# Altium PCB DriverBoard.PcbDoc
Units mm, origin at the board's own origin, x right, y up, seen from the top; angles counter-clockwise.
Board outline 74 x 64 mm, 4 copper layers (Top Signal Layer, Power Layer, Ground Layer, Bottom Signal Layer), stack 2.024 mm thick; 139 components, 34 nets, 401 pads, 541 vias.
Unrouted connection lines stored in the file: 176.
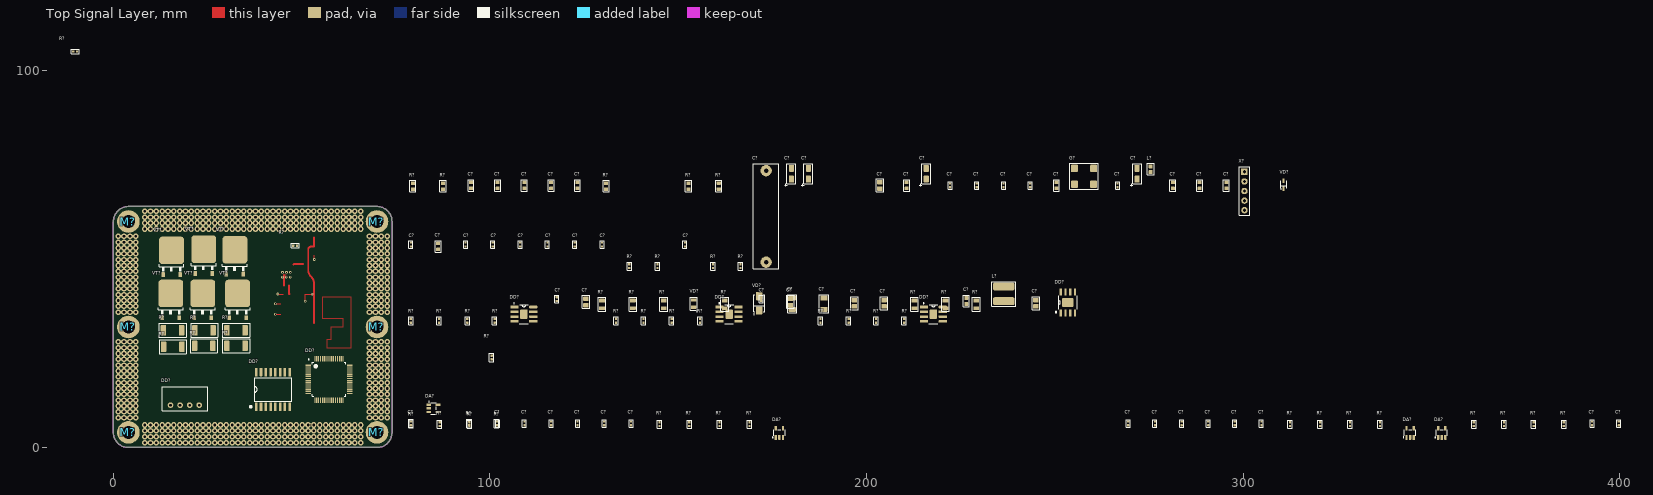
[diagram p0: Top Signal Layer view]
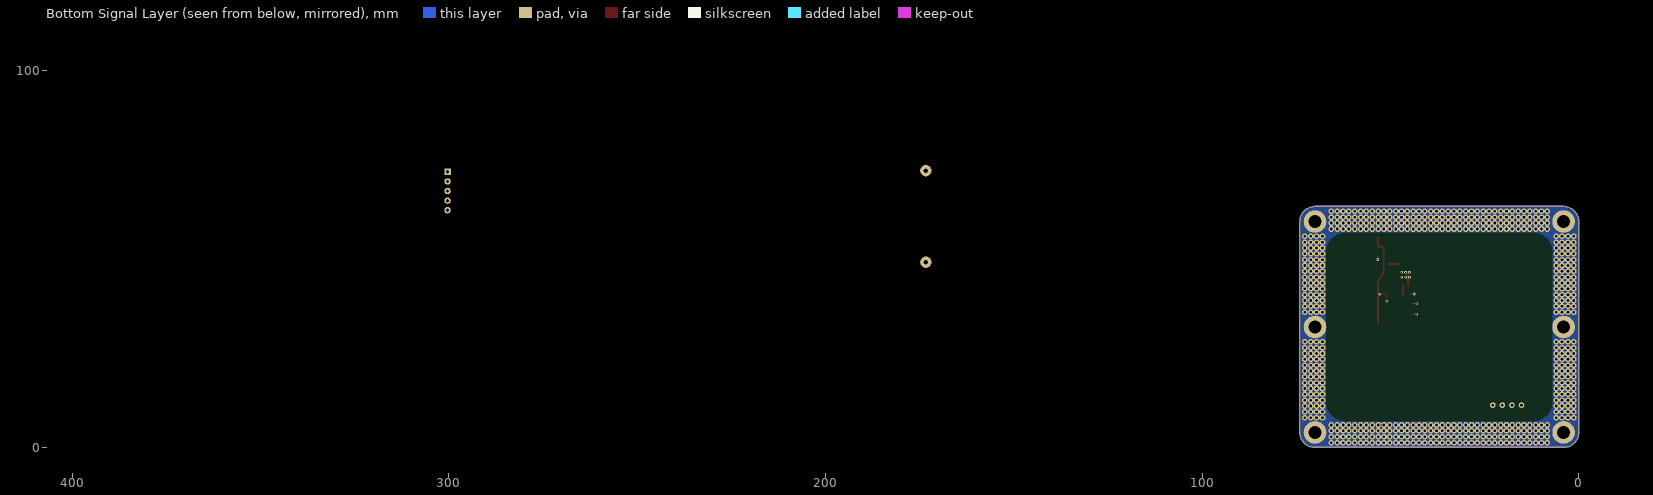
[diagram p1: Bottom Signal Layer view, seen from below]

## Layer stack, top to bottom
Top Solder: solder mask 0.0102, Solder Resist, Dk 3.5
Top Signal Layer: signal copper 0.0356
Dielectric 1: core 1.5, FR-4, Dk 4.2
Power Layer: signal copper 0.036
Dielectric 3: prepreg 0.127, Dk 4.2
Ground Layer: signal copper 0.036
Dielectric 2: core 0.254, Dk 4.2
Bottom Signal Layer: signal copper 0.0356
Bottom Solder: solder mask 0.0102, Solder Resist, Dk 3.5

## Board outline
0,3.9 0,60 cw(c4,60) 3.9,63.999 3.9,64 70.099,64 70.1,63.999 cw(c70,60) 74,60 74,3.901 73.999,3.9 cw(c70,4) 70,0 4,0 cw(c4,4)

## Design rules (kind name [scope] priority, off if disabled: settings)
Clearance "Stitching EGND" [IsStitchingVia and InNet('EGND') vs (IsVia and (Not IsStitchingVia)) Or IsPad] p1: gap=0.2 ignorepadtopadclearanceinfootprint=FALSE
Clearance Clearance_FU [InNet('NetFU1_1') vs InNet('GND')] p2: gap=0.4 ignorepadtopadclearanceinfootprint=FALSE except(0: Arc-Hole Track-Hole SMDPad-Hole THPad-Hole Via-Hole Fill-Hole Poly-Hole Region-Hole Text-Hole)
Clearance Clearance_12 [InNet('12B') vs InNet('GND')] p3: gap=0.4 ignorepadtopadclearanceinfootprint=FALSE except(0: Arc-Hole Track-Hole SMDPad-Hole THPad-Hole Via-Hole Fill-Hole Poly-Hole Region-Hole Text-Hole)
Clearance Clearance_tracks_inner [OnLayer('Power Layer') OR OnLayer('Ground Layer')] p4: gap=0.35 ignorepadtopadclearanceinfootprint=FALSE except(0: Arc-Hole Track-Hole SMDPad-Hole THPad-Hole Via-Hole Fill-Hole Poly-Hole Region-Hole Text-Hole) // Зазоры между проводниками на внутренних слоях
Clearance [All] p5: gap=0.2 ignorepadtopadclearanceinfootprint=FALSE except(0: Arc-Hole Track-Hole SMDPad-Hole THPad-Hole Via-Hole Fill-Hole Poly-Hole Region-Hole Text-Hole)
ComponentClearance [All] p1: gap=0.3 collisioncheckmode=3 verticalgap=0.01 showdistances=FALSE
HoleSize [All] p1: absolutevalues=TRUE maxlimit=10 minlimit=0.3 maxpercent=80.000 minpercent=20.000
MinimumSolderMaskSliver [All] p1: minsoldermaskwidth=0.09
PolygonConnect PolygonConnect_Via [IsVia] p1: connectstyle=Direct reliefconductorwidth=0.254 reliefentries=4 polygonreliefangle="90 Angle" airgapwidth=0.2
PolygonConnect PolygonConnect_EGND [InNet('EGND')] p2: connectstyle=Direct reliefconductorwidth=0.254 reliefentries=4 polygonreliefangle="90 Angle" airgapwidth=0.2
PolygonConnect PolygonConnect_1 [All] p3: connectstyle=Relief reliefconductorwidth=0.8 reliefentries=4 polygonreliefangle="90 Angle" airgapwidth=0.254
RoutingCorners [All] p1: cornerstyle=Round minsetback=0.2 maxsetback=2
RoutingVias [All] p1: holewidth=0.711 width=1.27 viastyle="Through Hole" minholewidth=0.711 minwidth=1.27 maxholewidth=0.711 maxwidth=1.27
SilkToSilkClearance [All] p1: silktosilkclearance=0
SilkToSolderMaskClearance [IsPad] p1: minsilkscreentomaskgap=0 clearancetoexposedcopper=TRUE
SolderMaskExpansion [All] p1: expansion=0.05
Width [All] p1: maxlimit=4 minlimit=0.2 preferedwidth=0.2
Width 3,3В [InNet('3,3В')] p2: maxlimit=2 minlimit=0.2 preferedwidth=1
Width 24В [InNet('24В')] p3: maxlimit=4 minlimit=0.2 preferedwidth=4
Width 5В [InNet('5В')] p4: maxlimit=3 minlimit=0.2 preferedwidth=3
24 further rules are at their usual default settings.

## Classes and differential pairs
component class DriverBoard_Driver: C? DD? R?
component class DriverBoard_Amp: C? DA? R?
component class DriverBoard_Bridge: R? VT?
component class DriverBoard_DC: C? DD? L? M? R? VD?
component class DriverBoard_MCU: C? DD? G? L? R? VD? X?

## Components (designator, comment, footprint, x,y, rotation, side; value= is the part's Value field where it differs from the comment)
C? "Capacitor" C0402 171.999,39.4 r90 top value=0,1мк
C? "Capacitor" C0805 179.749,38.65 r90 top value=1мк
C? "Capacitor" C0603 226.499,38.9 r90 top value=0,15мк
C? "Capacitor" C0402 117.749,39.4 r90 top value=0,1мк
C? "Capacitor" C0805 125.499,38.65 r90 top value=1мк
C? "Capacitor" C0402 93.5,53.9 r90 top value=0,1мк
C? "Capacitor" C0402 100.75,53.9 r90 top value=0,1мк
C? "Capacitor" C0402 108,53.9 r90 top value=0,1мк
C? "Capacitor" C0402 115.249,53.9 r90 top value=0,1мк
C? "Capacitor" C0402 122.499,53.9 r90 top value=0,1мк
C? "Capacitor" C0402 129.749,53.9 r90 top value=0,1мк
C? "Capacitor" C0402 151.749,53.9 r90 top value=0,1мк
C? "Capacitor" C0402 79,53.9 r90 top value=0,1мк
C? "Capacitor" C0603 86.25,53.4 r90 top value=1мк
C? "Capacitor_pol" "TANTAL CASE A" 180.049,72.7 r90 top value=10мк
C? "Capacitor_pol" "TANTAL CASE A" 184.549,72.7 r90 top value=10мк
C? "Capacitor" K78-2 173.349,61.4 r90 top value=1200
C? "Capacitor" C0603 123.249,69.6 r90 top value=0,01мк
C? "Capacitor" C0603 116.249,69.6 r90 top value=1мк
C? "Capacitor" C0603 94.95,69.6 r90 top value=1мк
C? "Capacitor" C0603 102.05,69.6 r90 top value=0,1мк
C? "Capacitor" C0603 109.15,69.6 r90 top value=0,1мк
C? "Capacitor" C0603 295.549,69.6 r90 top value=0,15мк
C? "Capacitor" C0603 288.449,69.6 r90 top value=2,2мк
C? "Capacitor" C0603 281.349,69.6 r90 top value=2,2мк
C? "Capacitor_pol" "TANTAL CASE A" 215.849,72.7 r90 top value=10мк
C? "Capacitor_pol" "TANTAL CASE A" 271.849,72.7 r90 top value=10мк
C? "Capacitor" C0402 266.649,69.6 r90 top value=0,1мк
C? "Capacitor" C0805 203.549,69.6 r90 top value=1мк
C? "Capacitor" C0603 210.649,69.6 r90 top value=0,15мк
C? "Capacitor_pol" C0603 250.449,69.6 r90 top value=100мк
C? "Capacitor" C0402 243.449,69.6 r90 top value=1000
C? "Capacitor" C0402 236.349,69.6 r90 top value=10
C? "Capacitor" C0402 229.249,69.6 r90 top value=10
C? "Capacitor" C0402 222.149,69.6 r90 top value=0,1мк
C? "Capacitor" C0805 204.649,38.3 r90 top value=0,01мк
C? "Capacitor" C0805 244.949,38.3 r90 top value=0,01мк
C? "Capacitor" C0805 196.749,38.3 r90 top value=0,01мк
C? "Capacitor" C1206 188.649,38.2 r90 top value=4,7мк
C? "Capacitor" C1206 180.249,38.2 r90 top value=4,7мк
C? "Capacitor" C0402 102.05,6.4 r90 top value=0,1мк
C? "Capacitor" C0402 130.349,6.4 r90 top value=1000
C? "Capacitor" C0402 109.15,6.4 r90 top value=10
C? "Capacitor" C0402 269.449,6.4 r90 top value=10
C? "Capacitor" C0402 392.649,6.4 r90 top value=0,1мк
C? "Capacitor" C0402 297.749,6.4 r90 top value=0,1мк
C? "Capacitor" C0402 276.549,6.4 r90 top value=1000
C? "Capacitor" C0402 116.249,6.4 r90 top value=10
C? "Capacitor" C0402 137.449,6.4 r90 top value=10
C? "Capacitor" C0402 123.249,6.4 r90 top value=0,1мк
C? "Capacitor" C0402 283.649,6.4 r90 top value=0,1мк
C? "Capacitor" C0402 399.749,6.4 r90 top value=10
C? "Capacitor" C0402 304.849,6.4 r90 top value=10
C? "Capacitor" C0402 290.749,6.4 r90 top value=1000
C? "Capacitor" C0402 79.05,6.4 r90 top value=0,1мк
DA? "LMV321ILT" SOT23-5 85,10.4 r0 top
DA? "LMV321ILT" SOT23-5 352.749,3.9 r90 top
DA? "LMV321ILT" SOT23-5 176.849,3.9 r90 top
DA? "LMV321ILT" SOT23-5 344.349,3.9 r90 top
DD? "UCC27201A" HSOP8 217.749,35.4 r0 top
DD? "UCC27201A" HSOP8 163.499,35.4 r0 top
DD? "UCC27201A" HSOP8 109,35.4 r0 top
DD? "STM32F405RGT6" LQFP64 57.25,18.075 r0 top
DD? "P6AU-xxxxELF" SIP4 15.17,11.25 r0 top
DD? "Name" SO16 42.375,15.425 r90 top
DD? "TPS5450" "SO Powerpad8" 253.449,38.5 r0 top
G? "KXO" QSMD7x5.2x1.8 257.749,72 r0 top
L? "Inductor" L0603 275.449,73.9 r90 top
L? "Inductor" SDR0604 236.449,40.8 r0 top value=15мкГн
M? "SCREW" SCREW3#1 6.8,6.6 r0 top
M? "SCREW" SCREW3#2 4,32 r0 top
M? "SCREW" SCREW3#3 15.4,52.6 r0 top
M? "SCREW" SCREW3#2 70,60 r0 top locked
M? "SCREW" SCREW3#2 70,32 r0 top locked
M? "SCREW" SCREW3#2 70,4 r0 top locked
R? "Resistor_0,062Вт" R0402 101.75,6.4 r90 top value=20к
R? "Resistor_0,062Вт" R0402 94.5,6.4 r90 top value=1к
R? "Resistor_0,062Вт" R0402 79,6.4 r90 top value=20к
R? "Resistor_0,5Вт" R2010 15.75,26.75 r180 top value=0,027
R? "Resistor_0,5Вт" R2010 15.711,31.131 r180 top value=0,027
R? "Resistor_0,5Вт" R2010 32.561,31.131 r180 top value=0,027
R? "Resistor_0,5Вт" R2010 24.085,31.131 r180 top value=0,027
R? "Resistor_0,5Вт" R2010 32.561,27 r180 top value=0,027
R? "Resistor_0,5Вт" R2010 24.011,27 r180 top value=0,027
R? "Resistor_0,062Вт" R0402 187.749,33.65 r90 top value=10к
R? "Resistor_0,062Вт" R0402 195.249,33.65 r90 top value=10к
R? "Resistor_0,062Вт" R0402 209.999,33.65 r90 top value=10
R? "Resistor_0,062Вт" R0402 202.499,33.65 r90 top value=10
R? "Resistor_0,062Вт" R0402 133.499,33.65 r90 top value=10к
R? "Resistor_0,062Вт" R0402 140.749,33.65 r90 top value=10к
R? "Resistor_0,062Вт" R0402 155.749,33.65 r90 top value=10
R? "Resistor_0,062Вт" R0402 148.249,33.65 r90 top value=10
R? "Resistor_0,062Вт" R0402 79,33.65 r90 top value=10к
R? "Resistor_0,062Вт" R0402 86.5,33.65 r90 top value=10к
R? "Resistor_0,062Вт" R0402 101.25,33.65 r90 top value=10
R? "Resistor_0,062Вт" R0402 94,33.65 r90 top value=10
R? "Resistor_0,062Вт" R0402 159.249,48.15 r90 top value=47
R? "Resistor_0,062Вт" R0402 144.499,48.15 r90 top value=47
R? "Resistor_0,062Вт" R0402 136.999,48.15 r90 top value=47
R? "Resistor_0,062Вт" R0402 166.499,48.15 r90 top value=10к
R? "Resistor_0,062Вт" R0603 152.749,69.4 r90 top value=5,1к
R? "Resistor_0,062Вт" R0603 87.55,69.4 r90 top value=62
R? "Resistor_0,062Вт" R0603 130.849,69.4 r90 top value=62
R? "Resistor_0,062Вт" R0603 160.749,69.4 r90 top value=5,1к
R? "Resistor_0,062Вт" R0603 79.55,69.4 r90 top value=5,1к
R? "Resistor_0,125Вт" R0805 162.349,38 r90 top value=0
R? "Resistor_0,125Вт" R0805 229.149,38 r90 top value=0
R? "Resistor_0,125Вт" R0805 129.749,38 r90 top value=0
R? "Resistor_0,125Вт" R0805 137.949,38 r90 top value=0
R? "Resistor_0,125Вт" R0805 146.149,38 r90 top value=3,3к
R? "Resistor_0,125Вт" R0805 220.949,38 r90 top value=330
R? "Resistor_0,125Вт" R0805 212.749,38 r90 top value=10к
R? "Resistor_0,062Вт" R0402 100.45,23.9 r90 top value=1к
R? "Resistor_0,062Вт" R0402 -10.135,105.175 r180 top value=1к
R? "Resistor_0,062Вт" R0402 48.25,53.603 r180 top value=20к
R? "Resistor_0,062Вт" R0402 94.55,6.2 r90 top value=1к
R? "Resistor_0,062Вт" R0402 152.949,6.2 r90 top value=20к
R? "Resistor_0,062Вт" R0402 168.949,6.2 r90 top value=1к
R? "Resistor_0,062Вт" R0402 320.449,6.2 r90 top value=1к
R? "Resistor_0,062Вт" R0402 377.149,6.2 r90 top value=20к
R? "Resistor_0,062Вт" R0402 385.149,6.2 r90 top value=1к
R? "Resistor_0,062Вт" R0402 336.349,6.2 r90 top value=20к
R? "Resistor_0,062Вт" R0402 86.65,6.2 r90 top value=1к
R? "Resistor_0,062Вт" R0402 145.049,6.2 r90 top value=1к
R? "Resistor_0,062Вт" R0402 160.949,6.2 r90 top value=1к
R? "Resistor_0,062Вт" R0402 312.449,6.2 r90 top value=1к
R? "Resistor_0,062Вт" R0402 361.249,6.2 r90 top value=1к
R? "Resistor_0,062Вт" R0402 369.249,6.2 r90 top value=1к
R? "Resistor_0,062Вт" R0402 328.349,6.2 r90 top value=1к
VD? "DiodeSchottky" SOD-323 310.749,69.8 r90 top
VD? "зеленый" L_0805 154.149,38.2 r90 top
VD? "DiodeSchottky" SMA 171.449,38.3 r90 top
VT? "N-MOSFET" DPAK 23.75,40.75 r0 top
VT? "N-MOSFET" DPAK 33,40.75 r0 top
VT? "N-MOSFET" DPAK 15.45,52.198 r0 top
VT? "N-MOSFET" DPAK 32.261,52.33 r0 top
VT? "N-MOSFET" DPAK 15.25,40.75 r0 top
VT? "N-MOSFET" DPAK 24,52.5 r0 top
X? "Header_5_plg" PLS-5 300.349,68.1 r0 top

## Footprints (in the part's own frame and the unit in brackets; to place one, negate y for a bottom-side part, rotate by r counter-clockwise, add the part's x,y. Pads: shape width x height; smd on the part's side, far side on the other; paste and mask are expansions set on the pad)
C0402 [mm]
  rrect25% 0.59x0.6 smd: 1(-0.5,-0.02) 2(0.525,-0.02)
  silkscreen extent -0.98,-0.55 0.98,0.51, body extent -0.49,-0.25 0.51,0.25, height 0.48
C0603 [mm]
  rrect25% 0.94x1.03 smd: 1(-0.8,0) 2(0.8,0)
  silkscreen extent -1.55,-0.77 1.53,0.77, body extent -0.8,-0.4 0.8,0.4, height 0.9
C0805 [mm]
  rrect25% 1.21x1.46 smd paste-5: 1(-0.845,0) 2(0.845,0)
  silkscreen extent -1.73,-1 1.73,1, body extent -1,-0.62 1,0.63, height 0.78
C1206 [mm]
  rrect25% 1.28x1.87 smd: 1(-1.528,-0.024) 2(1.472,-0.024)
  silkscreen extent -2.47,-1.25 2.4,1.22, body extent -1.6,-0.85 1.6,0.85, height 1.75
DPAK [mil]
  rrect25% 37x52 smd: 1(-89,-248) 3(89,-248)
  rrect25% 260x288 smd: 2(0,6)
  silkscreen extent -130,-213 130,-142, body extent -193,-266 128,108, height 91
HSOP8 [mm]
  rrect25% 2.17x0.68 smd: 1(-2.505,1.905) 2(-2.505,0.635) 3(-2.505,-0.635) 4(-2.505,-1.905) 5(2.505,-1.905) 6(2.505,-0.635) 7(2.505,0.635) 8(2.505,1.905)
  rrect25% 2.007x2.489 smd: ""(0,0)
  silkscreen extent -2.74,-2.5 1.2,3.02, body extent -3.01,-2.35 3.01,2.35, height 1.7
K78-2 [mm]
  round 3 hole 1.25 mask+0.102: 1(12.1,0)
  round 3 hole 1.25: 2(-12.2,0)
  silkscreen extent -14,-3.4 13.9,3.5, body extent -12.5,-3 12.5,3, height 13
L0603 [mm]
  rrect25% 1.05x1.07 smd paste-5: 1(-0.76,0) 2(0.76,0)
  silkscreen extent -1.53,-0.9 1.53,0.9, body extent -0.8,-0.4 0.8,0.4, height 0.8
L_0805 [mm] "SMD LED LAMP"
  rrect25% 0.91x1.46 smd: 1(-0.975,0) 2(0.975,0)
  silkscreen extent -2.15,-0.95 1.68,0.95, body extent -1.01,-0.62 1.01,0.63, height 1.1
LQFP64 [mm] "64-Pin Low Profile Quad Pack 0.5 mm Pitch, IPC High Density"
  rrect25% 1.5x0.3 smd mask+0.05: 1(-5.5,3.75) 2(-5.5,3.25) 3(-5.5,2.75) 4(-5.5,2.25) 5(-5.5,1.75) 6(-5.5,1.25) 7(-5.5,0.75) 8(-5.5,0.25) 9(-5.5,-0.25) 10(-5.5,-0.75) 11(-5.5,-1.25) 12(-5.5,-1.75) 13(-5.5,-2.25) 14(-5.5,-2.75) 15(-5.5,-3.25) 16(-5.5,-3.75) 33(5.5,-3.75) 34(5.5,-3.25) 35(5.5,-2.75) 36(5.5,-2.25) 37(5.5,-1.75) 38(5.5,-1.25) 39(5.5,-0.75) 40(5.5,-0.25) 41(5.5,0.25) 42(5.5,0.75) 43(5.5,1.25) 44(5.5,1.75) 45(5.5,2.25) 46(5.5,2.75) 47(5.5,3.25) 48(5.5,3.75)
  rrect25% 0.3x1.5 smd mask+0.05: 17(-3.75,-5.5) 18(-3.25,-5.5) 19(-2.75,-5.5) 20(-2.25,-5.5) 21(-1.75,-5.5) 22(-1.25,-5.5) 23(-0.75,-5.5) 24(-0.25,-5.5) 25(0.25,-5.5) 26(0.75,-5.5) 27(1.25,-5.5) 28(1.75,-5.5) 29(2.25,-5.5) 30(2.75,-5.5) 31(3.25,-5.5) 32(3.75,-5.5) 49(3.75,5.5) 50(3.25,5.5) 51(2.75,5.5) 52(2.25,5.5) 53(1.75,5.5) 54(1.25,5.5) 55(0.75,5.5) 56(0.25,5.5) 57(-0.25,5.5) 58(-0.75,5.5) 59(-1.25,5.5) 60(-1.75,5.5) 61(-2.25,5.5) 62(-2.75,5.5) 63(-3.25,5.5) 64(-3.75,5.5)
  silkscreen extent -5.45,-4.5 4.5,5.42, body extent -6,-6 6,6, height 1.5
PLS-5 [mm]
  rect 1.7x1.7 hole 0.9: 1(0,5.08)
  round 1.7 hole 0.9: 2(0,2.54) 3(0,0)
  round 1.7 hole 0.9 mask+0.102: 4(0,-2.54) 5(0,-5.08)
  silkscreen extent -1.4,-6.48 1.4,6.46, body extent -1.27,-6.35 1.27,6.35, height 8.54
QSMD7x5.2x1.8 [mm]
  rrect25% 1.8x2 smd: 1(-2.54,-2.1) 2(2.54,-2.1) 3(2.54,2.1) 4(-2.54,2.1)
  silkscreen extent -3.81,-3.43 3.81,3.43, body extent -3.5,-2.54 3.5,2.54, height 1.3
R0402 [mm]
  rrect25% 0.61x0.6 smd: 1(-0.5,0) 2(0.5,0)
  silkscreen extent -1.1,-0.6 1.07,0.6, body extent -0.55,-0.25 0.45,0.25, height 0.35
R0603 [mm]
  rrect25% 0.92x1.08 smd: 1(-0.8,0) 2(0.8,0)
  silkscreen extent -1.55,-0.8 1.55,0.82, body extent -0.8,-0.4 0.8,0.4, height 0.5
R0805 [mm] "Chip Resistor, 2-Leads, Body 2,10x1,30mm, IPC Medium Density"
  rrect25% 1.02x1.53 smd paste-5: 1(-1.008,0) 2(1.008,0)
  silkscreen extent -1.78,-1 1.85,1.02, body extent -1.1,-0.7 1.1,0.7, height 0.55
R2010 [mm]
  rrect25% 1.45x2.73 smd: 1(-2.415,0) 2(2.415,0)
  silkscreen extent -3.6,-1.9 3.6,1.9, body extent -2.5,-1.25 2.5,1.25, height 0.6
SCREW3#1 [mm]
  round 6 hole 3.4: 1(-2.8,-2.6)
SCREW3#2 [mm]
  round 6 hole 3.4: 1(0,0)
SCREW3#3 [mm]
  round 6 hole 3.4: 1(-11.4,7.4)
SDR0604 [mm] "SMD Power Inductors"
  rrect50% 5.8x2.1 smd: 1(0,1.95) 2(0,-1.95)
  silkscreen extent -3.2,-3.27 3.2,3.25, body extent -2.8,-2.75 2.8,2.75, height 4.55
SIP4 [mm]
  round 1.5 hole 0.7: 1(0,0) 2(2.54,0) 4(7.62,0)
  round 1.5 hole 0.7 paste+0: 3(5.08,0)
  silkscreen extent -2.2,-1.5 9.9,4.9, body extent -2.04,-1.28 9.64,4.72, height 10.2
SMA [mm]
  rrect25% 2.17x1.74 smd: 1(-1.88,0) 2(1.88,0)
  silkscreen extent -3.04,-1.46 2.29,1.46, body extent -2.5,-1.35 2.5,1.35, height 2.15
SO16 [mm]
  rrect25% 2.26x0.69 smd: 1(-4.61,4.445) 2(-4.61,3.175) 3(-4.61,1.905) 4(-4.61,0.635) 5(-4.61,-0.635) 6(-4.61,-1.905) 7(-4.61,-3.175) 8(-4.61,-4.445) 9(4.61,-4.445) 10(4.61,-3.175) 11(4.61,-1.905) 12(4.61,-0.635) 13(4.61,0.635) 14(4.61,1.905) 15(4.61,3.175) 16(4.61,4.445)
  silkscreen extent -4.86,-5.03 3.1,6.11, body extent -5.3,-5.27 5.3,5.23, height 2.59
"SO Powerpad8" [mm]
  rrect25% 0.61x1.91 smd: 1(-1.905,-2.78) 2(-0.635,-2.78) 3(0.635,-2.78) 4(1.905,-2.78) 5(1.905,2.78) 6(0.635,2.78) 7(-0.635,2.78) 8(-1.905,2.78)
  rrect25% 3.1x2.41 smd: 6(0,0)
  silkscreen extent -3.34,-2.76 2.5,1.75, body extent -2.45,-2.92 2.45,2.85, height 1.45
SOD-323 [mm]
  rrect25% 1.26x0.58 smd: 1(-1.03,0) 2(1.03,0)
  silkscreen extent -1.26,-0.82 1,0.82, body extent -1.3,-0.67 1.3,0.68, height 1.1
SOT23-5 [mm]
  rrect25% 1.26x0.61 smd: 1(-1.225,0.95) 2(-1.225,0) 3(-1.225,-0.95) 4(1.225,-0.95) 5(1.225,0.95)
  silkscreen extent -1.3,-1.52 0.75,1.84, body extent -1.6,-1.56 1.6,1.55, height 1.45
"TANTAL CASE A" [mm]
  rrect25% 1.81x1.36 smd: 1(-1.425,0) 2(1.425,0)
  silkscreen extent -3.37,-1.2 2.7,1.82, body extent -1.7,-0.9 1.7,0.9, height 1.8

## Part data
C? C? C? C? C? C? C? C? C? C? C? C? C? C? C? C? C? C?: library part cap277, "Конденсатор", Manufacture=Murata, Part Name=Ceramic, Part Number=GRM155R71H104KE14D, Voltage=50В, id=cap277, tga=0,10%, TKE=X7R
C? C? C?: library part cap151, "Конденсатор", Manufacture=Murata, Part Name=Ceramic, Part Number=GRM21BR71H105K, Voltage=50B, id=cap151, TKE=X7R
C? C? C?: library part cap132, "Конденсатор", Manufacture="Samsung Electro-Mechanics", Part Name=Ceramic, Part Number=CL10B154KB8VPNC, Voltage=50B, id=cap132, TKE=X7R
C? C? C?: library part cap133, "Конденсатор", Manufacture=Murata, Part Name=Ceramic, Part Number=GRM188R71C105KA12D**, Voltage=16B, id=cap133, TKE=X7R
C? C? C? C?: library part cap199, "Конденсатор полярный", Manufacture=Vishay, Part Name=Tantal, Part Number=293D106X9016A2TE3, Voltage=16В, id=cap199
C?: library part cap276, "Конденсатор", Manufacture=Россия, Part Name=Film, Part Number=К78-2-1200пФ-1600В,10%, Voltage=1600B, id=cap276, tga=0,10%
C?: library part cap124, "Конденсатор", Manufacture=Murata, Part Name=Ceramic, Part Number=GRM188R71H103K, Voltage=50B, id=cap124, TKE=X7R
C? C?: library part cap131, "Конденсатор", Manufacture=Murata, Part Name=Ceramic, Part Number=GRM188R71H104KA93D, Voltage=50B, id=cap131, TKE=X7R
C? C?: library part cap134, "Конденсатор", Manufacture=Murata, Part Name=Ceramic, Part Number=GRM188R71A225KE15D, Voltage=50B, id=cap134, TKE=X7R
C?: library part cap209, "Конденсатор полярный", Manufacture=Vishay, Part Name=Tantal, Part Number=293D107X9016D2TE3, Voltage=16В, id=cap209
C? C? C? C?: library part cap28, "Конденсатор", Manufacture=Murata, Part Name=Ceramic, Part Number=GRM1555C1H102J, Voltage=50B, id=cap28, TKE=NP0
C? C? C? C? C? C? C? C?: library part cap5, "Конденсатор", Manufacture=Murata, Part Name=Ceramic, Part Number=GRM1535C1H100J, Voltage=50B, id=cap5, TKE=NP0
C? C? C?: library part cap136, "Конденсатор", Manufacture=Murata, Part Name=Ceramic, Part Number=GRM216R71H103K, Voltage=50B, id=cap136, TKE=X7R
C? C?: library part cap188, "Конденсатор", Manufacture=Murata, Part Name=Ceramic, Part Number=GRM31CR71H475KA12L, Voltage=50В, id=cap188, TKE=X7R
DA? DA? DA? DA?: library part amp10, "HIGH-DRIVE OPERATIONAL AMPLIFIERS WITH SHUTDOWN", Input Bias Current=10nA, Manufacture="ST Microelectronics", Offset voltage=0,1mB, Part Name="Micropower / Operational Amplifiers", Supply Current max=200uA, Supply Voltage=2,7-6B, Bandwidth=1MHz, Channels=1, CMRR=85dB, id=amp10, Part Number=LMV321ILT, PSRR=80dB, Rail-to-rail=yes
DD? DD? DD?: library part driver25, "120-V Boot, 3-A Peak, High-Frequency, High-Side and Low-Side Driver", Manufacture="Texas Instruments", Maximum output current=3A, Maximum Power Dissipation=2,7W, Max Operating Supply Voltage=17B, Min Operating Supply Voltage=8B, Part Name="High-Side/Low-Side Driver", Part Number=UCC27201ADDA, id=driver25, Logic High=1,6B-2,5B, Logic Low=0,8B-1,6B, Vbus=120B, “A” OUTPUT=Noninverting, “B” OUTPUT=Noninverting
DD?: library part microcont10, Frequency=168MHz, Part Name=Microcontroller, Power Supply=1.8-3.6V, ADC=16x12b/2x12b, Flash=1Mb, id=microcont10, Interface="can, i2c, irda, lin, spi, uart, usbotg,sdio", Part Number=STM32F405RGT6, Pin in=51
DD?: library part pwr52, "DC/DC преобразователь", Current=200mA, Input Voltage=5B, Manufacturer="PEAK Electronics", Part Name="DC/DC Converter Isolated", Part Number=P6AU-0505ELF, id=pwr52, Output Voltage=5B, Type=Isolated
DD?: library part interf22, "Isolated CAN Transceiver", Current Consumption=76mA, Manufacture="Texas Instruments", Part Number=ISO1050DW, Power Supply=3-5,5В/4,75-5,25В, id=interf22, Number of Channel=1, Part Name="Isolated CAN Transceiver", Type Supply="Single Polar"
DD?: library part pwr12, "5-A, Wide Input Range, Step-Down Converter", Current=5A, Input Voltage="5,5 - 36B", Manufacturer="Texas Instruments", Output Voltage=Adj, Part Name="Step-Down Converter", id=pwr12, Part Number=TPS5450, Type=Impulse
G?: library part crystal10, "Кварц. генер. 32.768 МГц (HCMOS/TTL)", Frequence=12MHz, Manufacture=GEYER, Part Number=KXO-V97, id=crystal10
L?: library part ind0, "EMI Suppression Filter", Part Name="EMI Suppression Filters", Part Number=BLM18PG181SN1D, Rated Current=1,5A, Resistance=0,09Ohm, id=ind0
L?: library part ind44, "EMI Suppression Filter", Manufacture=Bourns, Part Name="SMD Power Inductors", Part Number="SDR0604- 150YL", Rated Current=1,3A, Resistance=0,14Ohm, Saturation Current=1,6A, id=ind44
M? M? M? M? M? M?: library part connect89, Part Name="Винт М3 с заземлением", id=connect89
R? R? R? R? R? R?: library part res301, "Резистор", Manufacture=Yageo, Part Name=Resistor, Part Number=RC0402FR-0720KL, Power=0,062Вт, Accuracy=0,01, id=res301
R? R? R? R? R? R? R? R? R? R? R? R? R? R?: library part res270, "Резистор", Manufacture=Yageo, Part Name=Resistor, Part Number=RC0402FR-071KL, Power=0,062Вт, Accuracy=0,01, id=res270
R? R? R? R? R? R?: library part res1151, "Резистор", Manufacture=Yageo, Part Name=Shunt, Part Number=RL2010FK-070R027L, Power=0,75Вт, Accuracy=0,01, id=res1151
R? R? R? R? R? R? R?: library part res294, "Резистор", Manufacture=Yageo, Part Name=Resistor, Part Number=RC0402FR-0710KL, Power=0,062Вт, Accuracy=0,01, id=res294
R? R? R? R? R? R?: library part res222, "Резистор", Manufacture=Yageo, Part Name=Resistor, Part Number=RC0402FR-0710RL, Power=0,062Вт, Accuracy=0,01, id=res222
R? R? R?: library part res238, "Резистор", Manufacture=Yageo, Part Name=Resistor, Part Number=RC0402FR-0747RL, Power=0,062Вт, Accuracy=0,01, id=res238
R? R? R?: library part res480, "Резистор", Manufacture=Yageo, Part Name=Resistor, Part Number=RC0603FR-075K1, Power=0,062Вт, Accuracy=0,01, id=res480
R? R?: library part res434, "Резистор", Manufacture=Yageo, Part Name=Resistor, Part Number=RC0603FR-0762RL, Power=0,062Вт, Accuracy=0,01, id=res434
R? R? R? R?: library part res0, "Резистор", Manufacture=Yageo, Part Name=Resistor, Part Number=RC0805FR-070RL, Power=0,125Вт, Accuracy=0,01, id=res0
R?: library part res85, "Резистор", Manufacture=Yageo, Part Name=Resistor, Part Number=RC0805FR-072K3, Power=0,125Вт, Accuracy=0,01, id=res85
R?: library part res61, "Резистор", Manufacture=Yageo, Part Name=Resistor, Part Number=RC0805FR-07330RL, Power=0,125Вт, Accuracy=0,01, id=res61
R?: library part res97, "Резистор", Manufacture=Yageo, Part Name=Resistor, Part Number=RC0805FR-0710KL, Power=0,125Вт, Accuracy=0,01, id=res97
VD?: library part diode19, "Диод Шоттки", Capacitance=50pF, Forward Current=10mA, Forward Voltage=0,64B, Manufacture="NXP Semiconductor", Max Reverse Voltage=40B, Part Name="Diode Schottky", Part Number=PMEG4010BEA.115, id=diode19, Number of Channels=1
VD?: library part diode5, "Светодиод", Part Name=LED, Part Number=KP-2012MGC, id=diode5
VD?: library part diode1, "Диод Шоттки", Forward Current=3A, Forward Voltage=0,55B, Manufacture="Taiwan Semiconductor", Max Reverse Voltage=40B, Part Name="Diode Schottky", Part Number=SK34A, id=diode1
VT? VT? VT? VT? VT? VT?: library part mosfert20, Continuous drain current=33A, Gate-to-source voltage=(+-)20B, Manufacturer="International Rectifier", Part Number=IRFR4615PbF, Power dissipation=144W, Pulsed drain current=140A, id=mosfert20, Rds=0,042Ohm, Structure=n-channel, Total gate charge=26nC, V drain-source max=150B
X?: library part connect6, "Разъем - 5 конт. вилка", Manufacture="Ningbo connfly electronic", Part Name=PLS-5, Part Number=DS1021-1*5SF112-B, Contact_1=+3,3B, Contact_2=SWCLK, Contact_3=GND, Contact_4=SWDIO, Contact_5=RESET, Etch=2,54mm, id=connect6

## Via types
v1: diameter 1.5, hole 0.7, Top Signal Layer to Bottom Signal Layer, tented top, 528 vias
v2: diameter 0.7, hole 0.3, Top Signal Layer to Bottom Signal Layer, tented both sides, 7 vias
v3: diameter 0.7, hole 0.3, Top Signal Layer to Bottom Signal Layer, tented bottom, 6 vias

## Nets (pads, with @x,y where several pads share a name; then routed paths per layer and width w, separated by ;. In a path a pad name is that pad's centre, name@x,y a point inside that pad or via, vN(x,y) a via of type N, cw(c..) or ccw(c..) an arc to the next point about the centre after c; other vN are vias at no path point)
3,3BD: C?.2@79.02,54.425 C?.2@86.25,54.2 C?.2@94.95,70.4 C?.2@102.05,70.4 DD?.1@37.93,10.815 G?.4 R?.2@152.749,70.2 VD?.2@310.749,70.83
5B_CAN: C?.1@180.049,71.275 C?.2@109.15,70.4 C?.2@116.249,70.4 DD?.4@22.79,11.25 DD?.16@37.93,20.035
5BD: C?.1@184.549,71.275 DD?.2@17.71,11.25
15B: C?.2@180.273,39.672 C?.2@188.673,39.672 C?.2@196.749,39.145 DD?.7@252.814,41.28
+2B5A: C?.2@102.07,6.925 C?.2@137.469,6.925 C?.2@229.269,70.125 C?.2@269.469,6.925 C?.2@283.669,6.925 C?.2@297.769,6.925 R?.1@79,5.9 R?.1@152.949,5.7 R?.1@336.349,5.7
+3,3BA: L?.2@275.449,74.66
+3,3BD: C?.1@215.849,71.275 C?.2@93.52,54.425 C?.2@100.77,54.425 C?.2@108.02,54.425 C?.2@115.269,54.425 C?.2@122.519,54.425 DD?.1@51.75,21.825 DD?.19 DD?.32 DD?.48 DD?.64 R?.2@166.499,48.65
+5B: C?.1@250.449,68.8 C?.2@204.649,39.145 L?.2@236.449,38.85 R?.1@162.349,36.992 R?.1@229.149,36.992 R?.2@212.749,39.007 R?.2@220.949,39.007
+5BA: C?.2@79.07,6.925 C?.2@123.269,6.925 C?.2@222.169,70.125 C?.2@392.669,6.925 DA?.5 R?.2@229.149,39.007
+5BD: R?.2@162.349,39.007
+12B: C?.2@117.769,39.925 C?.2@125.499,39.495 C?.2@172.019,39.925 C?.2@179.749,39.495 C?.2@203.549,70.445 C?.2@266.669,70.125 DD?.1@106.495,37.305 DD?.1@160.994,37.305 DD?.1@215.244,37.305
+48B: VT?.2@15.25,40.902 VT?.2@23.75,40.902 VT?.2@32.261,52.482
AGND: C?.1@79.07,5.9 C?.1@102.07,5.9 C?.1@123.269,5.9 C?.1@129.769,53.4 C?.1@130.369,5.9 C?.1@222.169,69.1 C?.1@243.469,69.1 C?.1@276.569,5.9 C?.1@283.669,5.9 C?.1@290.769,5.9 C?.1@297.769,5.9 C?.1@392.669,5.9 C?.2@271.849,74.125 C?.2@399.769,6.925 DA?.2 DD?.12@51.75,16.325 R?.1@328.349,5.7 R?.2@129.749,39.007
CANH_F: DD?.13@41.74,20.035 R?.1@160.749,68.6 R?.2@130.849,70.2
CANL_F: DD?.12@43.01,20.035 R?.1@87.55,68.6 R?.2@79.55,70.2
DGND: C?.1@79.02,53.4 C?.1@86.25,52.6 C?.1@93.52,53.4 C?.1@94.95,68.8 C?.1@100.77,53.4 C?.1@102.05,68.8 C?.1@108.02,53.4 C?.1@115.269,53.4 C?.1@122.519,53.4 C?.1@151.769,53.4 C?.1@173.349,73.5 C?.1@180.273,36.672 C?.1@188.673,36.672 C?.1@196.749,37.455 C?.1@204.649,37.455 C?.1@281.349,68.8 C?.1@288.449,68.8 C?.2@184.549,74.125 C?.2@215.849,74.125 C?.2@250.449,70.4 DD?.1@15.17,11.25 DD?.2@39.2,10.815 DD?.6@253.449,38.5 DD?.6@254.084,41.28 DD?.7@45.55,10.815 DD?.8@46.82,10.815 DD?.18 DD?.60 DD?.63 G?.2 R?.1@79,33.15 R?.1@86.5,33.15 R?.1@133.499,33.15 R?.1@140.749,33.15 R?.1@146.149,36.992 R?.1@187.749,33.15 R?.1@195.249,33.15 R?.2@137.949,39.007 VD?.1@154.149,37.225 VD?.2@171.449,40.18 X?.3
EGND: M?.1
  other v1: 8.3,1.253 9.85,1.253 11.4,1.253 12.95,1.253 14.5,1.253 16.05,1.253 17.6,1.253 19.15,1.253 20.7,1.253 22.25,1.253 23.8,1.253 25.35,1.253 26.9,1.253 28.45,1.253 30,1.253 31.55,1.253 33.1,1.253 34.65,1.253 36.2,1.253 37.75,1.253 39.3,1.253 40.85,1.253 42.4,1.253 43.95,1.253 45.5,1.253 47.05,1.253 48.6,1.253 50.15,1.253 51.7,1.253 53.25,1.253 54.8,1.253 56.35,1.253 57.9,1.253 59.45,1.253 61,1.253 62.55,1.253 64.1,1.253 65.65,1.253 8.3,2.827 9.85,2.827 11.4,2.827 12.95,2.827 14.5,2.827 16.05,2.827 17.6,2.827 19.15,2.827 20.7,2.827 22.25,2.827 23.8,2.827 25.35,2.827 26.9,2.827 28.45,2.827 30,2.827 31.55,2.827 33.1,2.827 34.65,2.827 36.2,2.827 37.75,2.827 39.3,2.827 40.85,2.827 42.4,2.827 43.95,2.827 45.5,2.827 47.05,2.827 48.6,2.827 50.15,2.827 51.7,2.827 53.25,2.827 54.8,2.827 56.35,2.827 57.9,2.827 59.45,2.827 61,2.827 62.55,2.827 64.1,2.827 65.65,2.827 8.3,4.401 9.85,4.401 11.4,4.401 12.95,4.401 14.5,4.401 16.05,4.401 17.6,4.401 19.15,4.401 20.7,4.401 22.25,4.401 23.8,4.401 25.35,4.401 26.9,4.401 28.45,4.401 30,4.401 31.55,4.401 33.1,4.401 34.65,4.401 36.2,4.401 37.75,4.401 39.3,4.401 40.85,4.401 42.4,4.401 43.95,4.401 45.5,4.401 47.05,4.401 48.6,4.401 50.15,4.401 51.7,4.401 53.25,4.401 54.8,4.401 56.35,4.401 57.9,4.401 59.45,4.401 61,4.401 62.55,4.401 64.1,4.401 65.65,4.401 8.3,5.975 9.85,5.975 11.4,5.975 12.95,5.975 14.5,5.975 16.05,5.975 17.6,5.975 19.15,5.975 20.7,5.975 22.25,5.975 23.8,5.975 25.35,5.975 26.9,5.975 28.45,5.975 30,5.975 31.55,5.975 33.1,5.975 34.65,5.975 36.2,5.975 37.75,5.975 39.3,5.975 40.85,5.975 42.4,5.975 43.95,5.975 45.5,5.975 47.05,5.975 48.6,5.975 50.15,5.975 51.7,5.975 53.25,5.975 54.8,5.975 56.35,5.975 57.9,5.975 59.45,5.975 61,5.975 62.55,5.975 64.1,5.975 65.65,5.975 1.253,7.925 2.827,7.925 4.401,7.925 5.975,7.925 68.025,7.925 69.599,7.925 71.173,7.925 72.747,7.925 1.253,9.475 2.827,9.475 4.401,9.475 5.975,9.475 68.025,9.475 69.599,9.475 71.173,9.475 72.747,9.475 1.253,11.025 2.827,11.025 4.401,11.025 5.975,11.025 68.025,11.025 69.599,11.025 71.173,11.025 72.747,11.025 1.253,12.575 2.827,12.575 4.401,12.575 5.975,12.575 68.025,12.575 69.599,12.575 71.173,12.575 72.747,12.575 1.253,14.125 2.827,14.125 4.401,14.125 5.975,14.125 68.025,14.125 69.599,14.125 71.173,14.125 72.747,14.125 1.253,15.675 2.827,15.675 4.401,15.675 5.975,15.675 68.025,15.675 69.599,15.675 71.173,15.675 72.747,15.675 1.253,17.225 2.827,17.225 4.401,17.225 5.975,17.225 68.025,17.225 69.599,17.225 71.173,17.225 72.747,17.225 1.253,18.775 2.827,18.775 4.401,18.775 5.975,18.775 68.025,18.775 69.599,18.775 71.173,18.775 72.747,18.775 1.253,20.325 2.827,20.325 4.401,20.325 5.975,20.325 68.025,20.325 69.599,20.325 71.173,20.325 72.747,20.325 1.253,21.875 2.827,21.875 4.401,21.875 5.975,21.875 68.025,21.875 69.599,21.875 71.173,21.875 72.747,21.875 1.253,23.425 2.827,23.425 4.401,23.425 5.975,23.425 68.025,23.425 69.599,23.425 71.173,23.425 72.747,23.425 1.253,24.975 2.827,24.975 4.401,24.975 5.975,24.975 68.025,24.975 69.599,24.975 71.173,24.975 72.747,24.975 1.253,26.525 2.827,26.525 4.401,26.525 5.975,26.525 68.025,26.525 69.599,26.525 71.173,26.525 72.747,26.525 1.253,28.075 2.827,28.075 4.401,28.075 5.975,28.075 68.025,28.075 69.599,28.075 71.173,28.075 72.747,28.075 1.253,35.925 2.827,35.925 4.401,35.925 5.975,35.925 68.025,35.925 69.599,35.925 71.173,35.925 72.747,35.925 1.253,37.475 2.827,37.475 4.401,37.475 5.975,37.475 68.025,37.475 69.599,37.475 71.173,37.475 72.747,37.475 1.253,39.025 2.827,39.025 4.401,39.025 5.975,39.025 68.025,39.025 69.599,39.025 71.173,39.025 72.747,39.025 1.253,40.575 2.827,40.575 4.401,40.575 5.975,40.575 68.025,40.575 69.599,40.575 71.173,40.575 72.747,40.575 1.253,42.125 2.827,42.125 4.401,42.125 5.975,42.125 68.025,42.125 69.599,42.125 71.173,42.125 72.747,42.125 1.253,43.675 2.827,43.675 4.401,43.675 5.975,43.675 68.025,43.675 69.599,43.675 71.173,43.675 72.747,43.675 1.253,45.225 2.827,45.225 4.401,45.225 5.975,45.225 68.025,45.225 69.599,45.225 71.173,45.225 72.747,45.225 1.253,46.775 2.827,46.775 4.401,46.775 5.975,46.775 68.025,46.775 69.599,46.775 71.173,46.775 72.747,46.775 1.253,48.325 2.827,48.325 4.401,48.325 5.975,48.325 68.025,48.325 69.599,48.325 71.173,48.325 72.747,48.325 1.253,49.875 2.827,49.875 4.401,49.875 5.975,49.875 68.025,49.875 69.599,49.875 71.173,49.875 72.747,49.875 1.253,51.425 2.827,51.425 4.401,51.425 5.975,51.425 68.025,51.425 69.599,51.425 71.173,51.425 72.747,51.425 1.253,52.975 2.827,52.975 4.401,52.975 5.975,52.975 68.025,52.975 69.599,52.975 71.173,52.975 72.747,52.975 1.253,54.525 2.827,54.525 4.401,54.525 5.975,54.525 68.025,54.525 69.599,54.525 71.173,54.525 72.747,54.525 1.253,56.075 2.827,56.075 4.401,56.075 5.975,56.075 68.025,56.075 69.599,56.075 71.173,56.075 72.747,56.075 8.3,58.025 9.85,58.025 11.4,58.025 12.95,58.025 14.5,58.025 16.05,58.025 17.6,58.025 19.15,58.025 20.7,58.025 22.25,58.025 23.8,58.025 25.35,58.025 26.9,58.025 28.45,58.025 30,58.025 31.55,58.025 33.1,58.025 34.65,58.025 36.2,58.025 37.75,58.025 39.3,58.025 40.85,58.025 42.4,58.025 43.95,58.025 45.5,58.025 47.05,58.025 48.6,58.025 50.15,58.025 51.7,58.025 53.25,58.025 54.8,58.025 56.35,58.025 57.9,58.025 59.45,58.025 61,58.025 62.55,58.025 64.1,58.025 65.65,58.025 8.3,59.599 9.85,59.599 11.4,59.599 12.95,59.599 14.5,59.599 16.05,59.599 17.6,59.599 19.15,59.599 20.7,59.599 22.25,59.599 23.8,59.599 25.35,59.599 26.9,59.599 28.45,59.599 30,59.599 31.55,59.599 33.1,59.599 34.65,59.599 36.2,59.599 37.75,59.599 39.3,59.599 40.85,59.599 42.4,59.599 43.95,59.599 45.5,59.599 47.05,59.599 48.6,59.599 50.15,59.599 51.7,59.599 53.25,59.599 54.8,59.599 56.35,59.599 57.9,59.599 59.45,59.599 61,59.599 62.55,59.599 64.1,59.599 65.65,59.599 8.3,61.173 9.85,61.173 11.4,61.173 12.95,61.173 14.5,61.173 16.05,61.173 17.6,61.173 19.15,61.173 20.7,61.173 22.25,61.173 23.8,61.173 25.35,61.173 26.9,61.173 28.45,61.173 30,61.173 31.55,61.173 33.1,61.173 34.65,61.173 36.2,61.173 37.75,61.173 39.3,61.173 40.85,61.173 42.4,61.173 43.95,61.173 45.5,61.173 47.05,61.173 48.6,61.173 50.15,61.173 51.7,61.173 53.25,61.173 54.8,61.173 56.35,61.173 57.9,61.173 59.45,61.173 61,61.173 62.55,61.173 64.1,61.173 65.65,61.173 8.3,62.747 9.85,62.747 11.4,62.747 12.95,62.747 14.5,62.747 16.05,62.747 17.6,62.747 19.15,62.747 20.7,62.747 22.25,62.747 23.8,62.747 25.35,62.747 26.9,62.747 28.45,62.747 30,62.747 31.55,62.747 33.1,62.747 34.65,62.747 36.2,62.747 37.75,62.747 39.3,62.747 40.85,62.747 42.4,62.747 43.95,62.747 45.5,62.747 47.05,62.747 48.6,62.747 50.15,62.747 51.7,62.747 53.25,62.747 54.8,62.747 56.35,62.747 57.9,62.747 59.45,62.747 61,62.747 62.55,62.747 64.1,62.747 65.65,62.747
  other v2: 52.425,6
GND_CAN: C?.1@109.15,68.8 C?.1@116.249,68.8 C?.2@123.249,70.4 C?.2@173.349,49.2 C?.2@180.049,74.125 DD?.3@20.25,11.25 DD?.9@46.82,20.035 DD?.10@45.55,20.035 DD?.15@39.2,20.035 R?.1@79.55,68.6 R?.2@160.749,70.2
MCU_CAN1_RX: DD?.3@40.47,10.815 DD?.44
MCU_CAN1_TX: DD?.6@44.28,10.815 DD?.45 R?.1@152.749,68.6
MCU_RESET: C?.2@151.769,54.425 DD?.7@51.75,18.825 R?.1@166.499,47.65 R?.2@136.999,48.65
MCU_SWCLK: DD?.49 R?.2@159.249,48.65
MCU_SWDIO: DD?.46 R?.2@144.499,48.65
NetC?_1: C?.1@123.249,68.8 R?.1@130.849,68.6 R?.2@87.55,70.2
NetC?_2: C?.2@236.369,70.125 DA?.4@353.699,5.125 R?.1@-9.635,105.175 R?.2@101.75,6.9
NetDD?_3: DD?.3@106.495,34.765 R?.1@101.25,33.15
NetDD?_4: DD?.4@255.354,35.72 R?.1@212.749,36.992 R?.2@146.149,39.007
NetDD?_5: DD?.5@51.75,19.825 G?.3
NetDD?_6: DD?.6@111.505,34.765 DD?.30 R?.2@86.5,34.15
NetDD?_8: DD?.8@111.505,37.305 R?.1@94,33.15
NetR?_1: R?.1@100.45,23.4 R?.2@21.67,31.131 R?.2@30.146,31.131 VT?.3@17.711,45.898
NetR?_2: R?.2@209.999,34.15 VT?.1@21.489,34.451
NetVD?_1: VD?.1@310.749,68.77 X?.1
PGND: C?.1@117.769,38.9 C?.1@125.499,37.805 C?.1@172.019,38.9 C?.1@179.749,37.805 C?.1@203.549,68.755 C?.1@266.669,69.1 DD?.7@111.505,36.035 DD?.7@166.004,36.035 DD?.7@220.254,36.035 R?.1@18.126,31.131 R?.1@18.165,26.75 R?.1@26.5,31.131 R?.1@26.426,27 R?.1@34.976,27 R?.1@34.976,31.131 R?.1@94.5,5.9 R?.1@94.55,5.7 R?.1@129.749,36.992 R?.1@137.949,36.992 R?.1@160.949,5.7 R?.1@385.149,5.7
pads on no net: C?.1@109.17,5.9 C?.1@116.269,5.9 C?.1@137.469,5.9 C?.1@210.649,68.8 C?.1@226.499,38.1 C?.1@229.269,69.1 C?.1@236.369,69.1 C?.1@244.949,37.455 C?.1@269.469,5.9 C?.1@271.849,71.275 C?.1@295.549,68.8 C?.1@304.869,5.9 C?.1@399.769,5.9 C?.2@109.17,6.925 C?.2@116.269,6.925 C?.2@129.769,54.425 C?.2@130.369,6.925 C?.2@210.649,70.4 C?.2@226.499,39.7 C?.2@243.469,70.125 C?.2@244.949,39.145 C?.2@276.569,6.925 C?.2@281.349,70.4 C?.2@288.449,70.4 C?.2@290.769,6.925 C?.2@295.549,70.4 C?.2@304.869,6.925 DA?.1 DA?.3 DA?.4@86.225,9.45 DA?.4@177.799,5.125 DA?.4@345.299,5.125 DD?. DD?.1@251.544,35.72 DD?.2@51.75,21.325 DD?.2@106.495,36.035 DD?.2@160.994,36.035 DD?.2@215.244,36.035 DD?.2@252.814,35.72 DD?.3@51.75,20.825 DD?.3@160.994,34.765 DD?.3@215.244,34.765 DD?.3@254.084,35.72 DD?.4@41.74,10.815 DD?.4@51.75,20.325 DD?.4@106.495,33.495 DD?.4@160.994,33.495 DD?.4@215.244,33.495 DD?.5@43.01,10.815 DD?.5@111.505,33.495 DD?.5@166.004,33.495 DD?.5@220.254,33.495 DD?.5@255.354,41.28 DD?.6@51.75,19.325 DD?.6@166.004,34.765 DD?.6@220.254,34.765 DD?.8@51.75,18.325 DD?.8@166.004,37.305 DD?.8@220.254,37.305 DD?.8@251.544,41.28 DD?.9@51.75,17.825 DD?.10@51.75,17.325 DD?.11 DD?.13@51.75,15.825 DD?.14 DD?.15@51.75,14.825 DD?.16@51.75,14.325 DD?.17 DD?.20 DD?.21 DD?.22 DD?.23 DD?.24 DD?.25 DD?.26 DD?.27 DD?.28 DD?.29 DD?.31 DD?.33 DD?.34 DD?.35 DD?.36 DD?.37 DD?.38 DD?.39 DD?.40 DD?.41 DD?.42 DD?.43 DD?.47 DD?.50 DD?.51 DD?.52 DD?.53 DD?.54 DD?.55 DD?.56 DD?.57 DD?.58 DD?.59 DD?.61 DD?.62 G?.1 L?.1 R?.1@48.75,53.603 R?.1@86.65,5.7 R?.1@101.75,5.9 R?.1@136.999,47.65 R?.1@144.499,47.65 R?.1@145.049,5.7 R?.1@148.249,33.15 R?.1@155.749,33.15 R?.1@159.249,47.65 R?.1@168.949,5.7 R?.1@202.499,33.15 R?.1@209.999,33.15 R?.1@220.949,36.992 R?.1@312.449,5.7 R?.1@320.449,5.7 R?.1@361.249,5.7 R?.1@369.249,5.7 R?.1@377.149,5.7 R?.2@13.296,31.131 R?.2@13.335,26.75 R?.2@21.596,27 R?.2@30.146,27 R?.2@47.75,53.603 R?.2@79,6.9 R?.2@79,34.15 R?.2@86.65,6.7 R?.2@94,34.15 R?.2@94.5,6.9 R?.2@94.55,6.7 R?.2@100.45,24.4 R?.2@101.25,34.15 R?.2@133.499,34.15 R?.2@140.749,34.15 R?.2@145.049,6.7 R?.2@148.249,34.15 R?.2@152.949,6.7 R?.2@155.749,34.15 R?.2@160.949,6.7 R?.2@168.949,6.7 R?.2@187.749,34.15 R?.2@195.249,34.15 R?.2@202.499,34.15 R?.2@312.449,6.7 R?.2@320.449,6.7 R?.2@328.349,6.7 R?.2@336.349,6.7 R?.2@361.249,6.7 R?.2@369.249,6.7 R?.2@377.149,6.7 R?.2@385.149,6.7 R?.2@-10.635,105.175 VD?.1@171.449,36.42 VD?.2@154.149,39.175 VT?.1@12.989,34.451 VT?.1@13.19,45.898 VT?.1@21.739,46.201 VT?.1@30,46.031 VT?.1@30.739,34.451 VT?.2@15.45,52.35 VT?.2@24,52.652 VT?.2@33,40.902 VT?.3@17.511,34.451 VT?.3@26.011,34.451 VT?.3@26.261,46.201 VT?.3@34.521,46.031 VT?.3@35.261,34.451 X?.2 X?.4 X?.5
copper on no net: | length 41.7
  Top Signal Layer w0.3: v2@43.016,35.343 44.417,35.343 ; v2@43.016,38.143 44.417,38.143 ; v2@43.671,40.718 45.072,40.718 ; 45.325,45.843 45.96,45.843 ; v2@50.917,38.868 50.917,40.713 v2@52.762,40.713 ; v2@53.353,49.933 53.353,51.061
  Top Signal Layer w0.5: 45.325,43.063 45.325,45.843 ; 46.595,43.063 46.595,40.884 46.762,40.718 ; 47.865,48.623 47.937,48.694 50.392,48.694 ; 53.288,32.986 53.288,43.494 ccw(c50.748,43.494) 52.544,45.29 52.494,45.34 cw(c54.29,47.136) 51.75,47.136 51.75,52.531 cw(c52.6,52.531) 52.6,53.381 53.236,53.381 53.236,55.669 53.297,55.731
  other v2: 43.016,35.373 43.016,38.173 50.935,38.843 52.787,40.73 43.671,40.748 53.384,49.933
  other v3: 44.917,45.249 45.945,45.249 47,45.249 44.917,46.5 45.965,46.5 47,46.5

## Polygon pours and split planes (outlines as drawn)
no net on Top Signal Layer "Top Signal Layer-No Net" (solid, remove dead copper, pour order 66): 56.65,26.541 63.15,26.541 63.15,39.885 55.4,39.878 55.4,34.381 60.9,34.381 60.9,31.89 57.693,31.89 57.693,28.631 56.65,28.631
EGND on Bottom Signal Layer "Top Signal Layer-No Net" (solid, remove dead copper, pour order 64): 0,15 7,15 7,52 cw(c11.989,52) 11.989,56.989 45.239,56.989 62.005,56.989 cw(c62.005,51.995) 67,51.995 67,12.046 cw(c61.954,12.046) 61.954,7 29.25,7 12,7 cw(c12,12) 7,12 7,15 0,15 0,7 0,3.9 ccw(c3.9,3.9) 3.9,0 66.939,0 74.005,0 73.999,56.989 73.999,60.001 ccw(c69.955,60.001) 69.951,64.045 15.25,63.999 7,63.999 3.999,63.999 ccw(c3.998,60) 0,60

## Keep-outs
Keep-Out Layer:
  lines w0.1: 0,3.9 0,60 cw(c4,60) 3.9,63.999 ; 0.001,3.9 ccw(c4,4) 4,0 70,0 ccw(c70,4) 73.999,3.9 ; 3.9,64 70.099,64 ; 70.1,63.999 cw(c70,60) 74,60 74,3.901

## Silkscreen, mask and mechanical layers (free items; w line width, h text height)
Bottom Solder:
  region: 7,64.049 15.75,64.049 15.75,57 12,57 ccw(c12,52) 7,52 7,40 7,12 ccw(c12,12) 12,7 45.25,7 62,7 ccw(c62,12) 67,12 67,46 67,52 ccw(c62,52) 62,57 15.75,57 15.75,64.059 67,64.049 69.951,64.049 cw(c69.951,59.951) 74.049,59.951 74.049,7 74.049,3.889 cw(c70.16,3.889) 70.16,0 7,0 3.95,0 cw(c3.95,3.95) 0.001,3.949 -0.009,59.84 cw(c4.198,59.841) 4.198,64.049